# Altium PCB plexus_hand_sense_template.PcbDoc
Units mil, origin at the board's own origin, x right, y up, seen from the top; angles counter-clockwise.
Board outline 4191.36 x 2764.97 mil, 4 copper layers (Top Layer, Int1 (GND), Int2 (PWR), Bottom Layer), stack 53.912 mil thick; 1 components, 26 nets, 33 pads, 0 vias.
Unrouted connection lines stored in the file: 137.
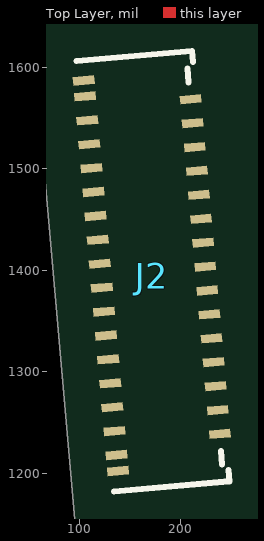
[diagram p0: Top Layer view]
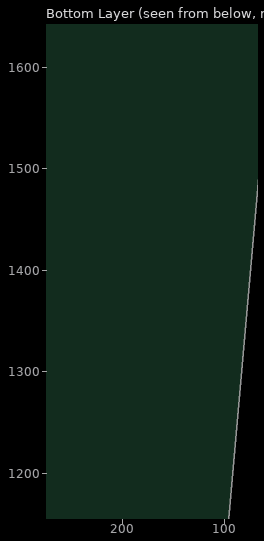
[diagram p1: Bottom Layer view, seen from below]

## Layer stack, top to bottom
Top Solder: solder mask 1, SM-001, Dk 4
Top Layer: signal copper 1.378
Dielectric 1: prepreg 5.1, PP-017, Dk 4.3
Dielectric 2: prepreg 5.1, PP-017, Dk 4.3
Int1 (GND): signal copper 1.378
Dielectric 3: core 28, Core-039, Dk 4.8
Int2 (PWR): signal copper 1.378
Dielectric 4: prepreg 5.1, PP-017, Dk 4.3
Dielectric 5: prepreg 5.1, PP-017, Dk 4.3
Bottom Layer: signal copper 1.378
Bottom Solder: solder mask 1, SM-001, Dk 4

## Board outline
173.67,263.38 ccw(c447.46,287.33) 445.45,12.5 1614.43,3.94 ccw(c1616.65,307.34) 1918.91,280.9 1991.45,1110.05 cw(c2282.88,1084.55) 2308.39,1375.99 3795.55,1245.88 ccw(c3820.84,1534.97) 4109.94,1509.69 4188.25,2404.74 ccw(c3877.18,2431.95) 3890.36,2743.93 ccw(c2110.73,-60515.19) 445.45,2747.04 ccw(c453.31,2291.75) -0.12,2249.77

## Design rules (kind name [scope] priority, off if disabled: settings)
BoardOutlineClearance [All] p1: gap=10 ignorepadtopadclearanceinfootprint=FALSE
Clearance [All] p1: gap=5 ignorepadtopadclearanceinfootprint=FALSE
PlaneClearance [All] p1: clearance=10
PlaneConnect [All] p1: planeconnectstyle=Direct reliefexpansion=20 reliefentries=4 reliefconductorwidth=10 reliefairgap=10
PolygonConnect [All] p1: connectstyle=Direct reliefconductorwidth=10 reliefentries=4 polygonreliefangle="90 Angle" airgapwidth=10
RoutingVias [All] p1: holewidth=10 width=20 viastyle="Through Hole" minholewidth=10 minwidth=20 maxholewidth=50 maxwidth=100
SolderMaskExpansion [IsVia] p1: expansion=4 istentingtop=TRUE
Width [All] p1: maxlimit=40 minlimit=5 preferedwidth=10
28 further rules are at their usual default settings.

## Components (designator, comment, footprint, x,y, rotation, side; value= is the part's Value field where it differs from the comment)
J2 "5047543100" CON_5047543100_MOL 172.77,1399.08 r275 top locked

## Footprints (in the part's own frame and the unit in brackets; to place one, negate y for a bottom-side part, rotate by r counter-clockwise, add the part's x,y. Pads: shape width x height; smd on the part's side, far side on the other; paste and mask are expansions set on the pad)
CON_5047543100_MOL [mm]
  rect 0.22x0.54 smd paste+0 mask+0.076: 1(-4.5,-1.31) 3(-3.9,-1.31) 5(-3.3,-1.31) 7(-2.7,-1.31) 9(-2.1,-1.31) 11(-1.5,-1.31) 13(-0.9,-1.31) 15(-0.3,-1.31) 17(0.3,-1.31) 19(0.9,-1.31) 21(1.5,-1.31) 23(2.1,-1.31) 25(2.7,-1.31) 27(3.3,-1.31) 29(3.9,-1.31) 31(4.5,-1.31) P1(-4.9,-1.31) P2(4.9,-1.31)
  rect 0.22x0.53 smd paste+0 mask+0.076: 2(-4.2,1.31) 4(-3.6,1.31) 6(-3,1.31) 8(-2.4,1.31) 10(-1.8,1.31) 12(-1.2,1.31) 14(-0.6,1.31) 16(0,1.31) 18(0.6,1.31) 20(1.2,1.31) 22(1.8,1.31) 24(2.4,1.31) 26(3,1.31) 28(3.6,1.31) 30(4.2,1.31)
  silkscreen extent -5.4,-1.45 5.4,1.45, body extent -5.4,-1.53 5.4,1.48, height 1.46

## Part data
J2: "No Description Available", Mfr_Name="Molex Connector Corporation", RefDes=RefDes, Type=Type

## Nets (pads, with @x,y where several pads share a name; then routed paths per layer and width w, separated by ;. In a path a pad name is that pad's centre, name@x,y a point inside that pad or via, vN(x,y) a via of type N, cw(c..) or ccw(c..) an arc to the next point about the centre after c; other vN are vias at no path point)
1V8: J2.1 J2.2 J2.3
GND: J2.16 J2.17 J2.18 J2.19 J2.P1 J2.P2
I2C_CH1_SCK: J2.5
I2C_CH1_SDA: J2.4
I2C_CH2_SCK: J2.7
I2C_CH2_SDA: J2.6
I2C_CH3_SCK: J2.9
I2C_CH3_SDA: J2.8
I2C_CH4_SCK: J2.11
I2C_CH4_SDA: J2.10
I2C_CH5_SCK: J2.13
I2C_CH5_SDA: J2.12
I2C_CH6_SCK: J2.15
I2C_CH6_SDA: J2.14
I2C_CH7_SCK: J2.21
I2C_CH7_SDA: J2.20
I2C_CH8_SCK: J2.23
I2C_CH8_SDA: J2.22
I2C_CH9_SCK: J2.25
I2C_CH9_SDA: J2.24
I2C_CH10_SCK: J2.27
I2C_CH10_SDA: J2.26
I2C_CH11_SCK: J2.29
I2C_CH11_SDA: J2.28
I2C_CH12_SCK: J2.31
I2C_CH12_SDA: J2.30

## Silkscreen, mask and mechanical layers (free items; w line width, h text height)
Mechanical 1:
  the board outline again, w8